# Altium PCB PCB1.PcbDoc
Units mm, origin at the board's own origin, x right, y up, seen from the top; angles counter-clockwise.
Board outline 27.69 x 26.04 mm, 2 copper layers (Top Layer, Bottom Layer); 14 components, 16 nets, 60 pads, 5 vias.
Unrouted connection lines stored in the file: 6.
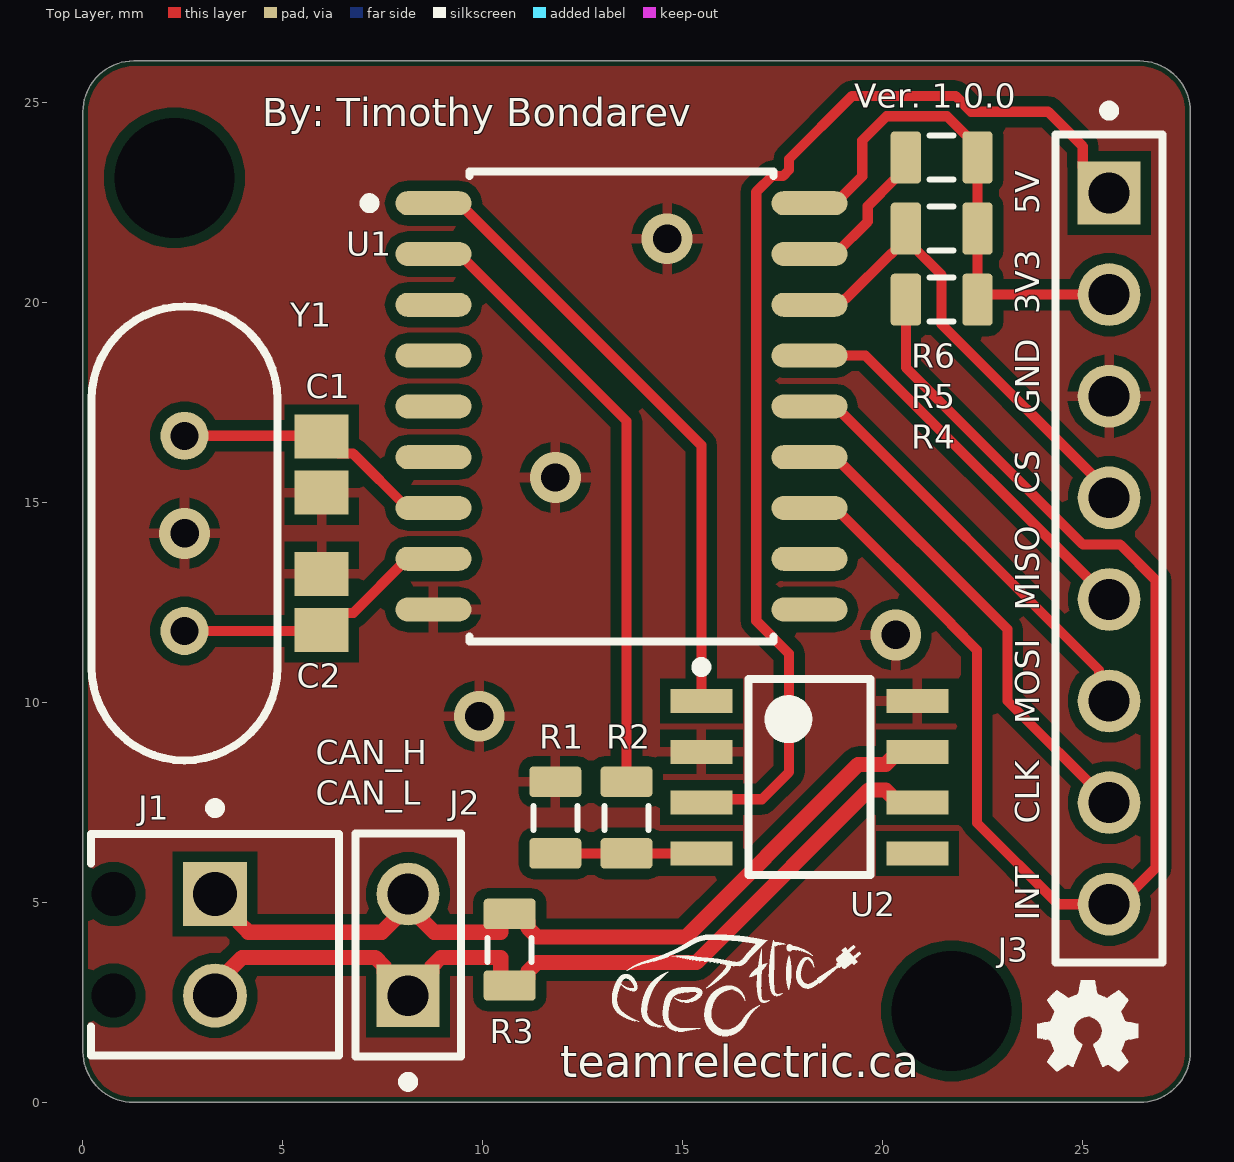
[diagram p0: Top Layer view]
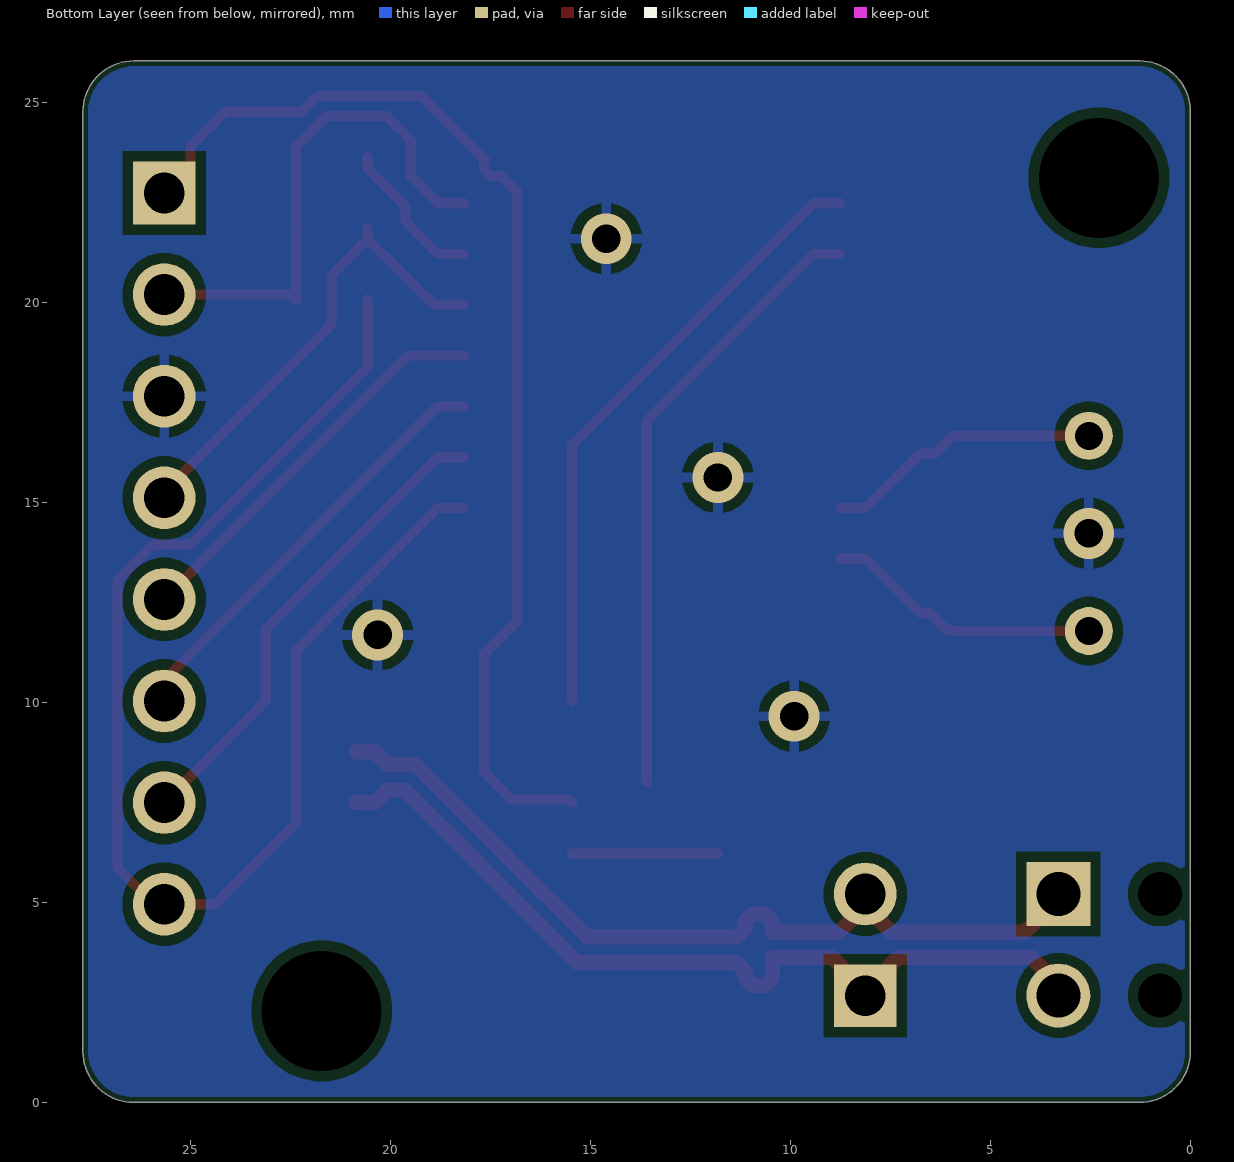
[diagram p1: Bottom Layer view, seen from below]
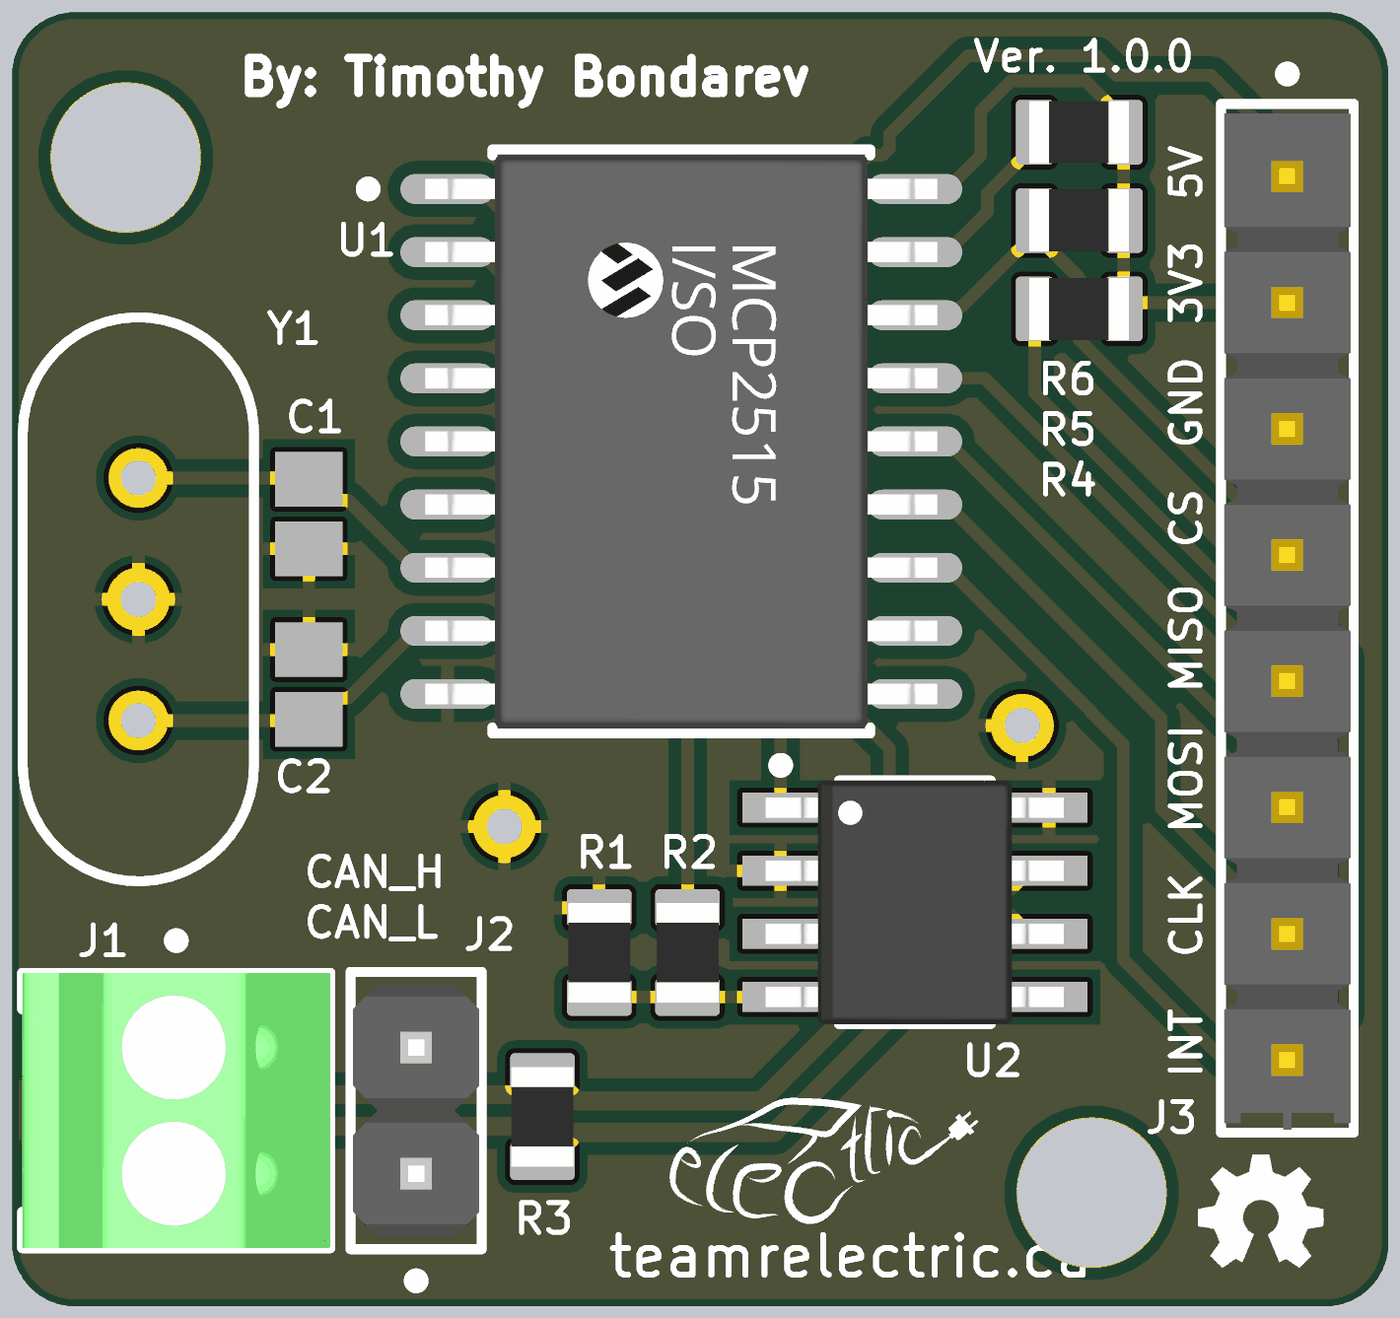
[diagram p2: 3D render of the assembled board from above, using the file's embedded part models]

## Layer stack, top to bottom
Top Solder: solder mask 0.0102, Solder Resist, Dk 3.5
Top Layer: signal copper 0.0356
Dielectric 1: dielectric 0.32, FR-4, Dk 4.8
Bottom Layer: signal copper 0.0356
Bottom Solder: solder mask 0.0102, Solder Resist, Dk 3.5

## Board outline
0,1.27 0,24.765 cw(c1.27,24.765) 1.27,26.035 26.416,26.035 cw(c26.416,24.765) 27.686,24.765 27.686,1.27 cw(c26.416,1.27) 26.416,0 1.27,0 cw(c1.27,1.27)

## Design rules (kind name [scope] priority, off if disabled: settings)
BoardOutlineClearance [All] p1: gap=0.127 ignorepadtopadclearanceinfootprint=FALSE except(0: Arc-SplitContinuation Track-SplitContinuation SMDPad-SplitContinuation THPad-SplitContinuation Via-SplitContinuation Fill-SplitContinuation Poly-SplitContinuation Region-SplitContinuation Text-SplitContinuation)
Clearance [All] p1: gap=0.254 ignorepadtopadclearanceinfootprint=FALSE except(0: Arc-Hole Track-Hole SMDPad-Hole THPad-Hole Via-Hole Fill-Hole Poly-Hole Region-Hole Text-Hole)
DiffPairsRouting [All] p1: maxlimit=0.254 minlimit=0.254 mostfreqgap=0.254 toplayer_minwidth=0.381 toplayer_maxwidth=0.381 toplayer_prefwidth=0.381 bottomlayer_minwidth=0.381 bottomlayer_maxwidth=0.381 bottomlayer_prefwidth=0.381 maxuncoupledlength=12.7
HoleSize [All] p1: absolutevalues=TRUE maxlimit=3 minlimit=0.025 maxpercent=80.000 minpercent=20.000
MinimumSolderMaskSliver [All] p1: minsoldermaskwidth=0.09
PolygonConnect [All] p1: connectstyle=Relief reliefconductorwidth=0.254 reliefentries=4 polygonreliefangle="90 Angle" airgapwidth=0.254
RoutingVias [All] p1: holewidth=0.711 width=1.27 viastyle="Through Hole" minholewidth=0.711 minwidth=1.27 maxholewidth=0.711 maxwidth=1.27
SilkToSilkClearance [All] p1: silktosilkclearance=0.2
SilkToSolderMaskClearance [IsPad] p1: minsilkscreentomaskgap=0.1 clearancetoexposedcopper=TRUE
SolderMaskExpansion [All] p1: expansion=0.102 istentingtop=FALSE
Width [All] p1: maxlimit=0.254 minlimit=0.254 preferedwidth=0.254
25 further rules are at their usual default settings.

## Classes and differential pairs
differential pair CAN: +CAN_P -CAN_N

## Components (designator, comment, footprint, x,y, rotation, side; value= is the part's Value field where it differs from the comment)
C1 "22pF" CAPC2013X140X50LL20T25 5.969,15.94 r90 top
C2 "22pF" CAPC2013X140X50LL20T25 5.969,12.511 r270 top
J1 "1725656" PHOE-1725656-2 3.302,3.937 r270 top
J2 "M20-9990246" FP-M20-9990246-MFG 8.128,3.937 r90 top
J3 "TSW-108-08-G-S" FP-TSW-108-08-G-S-MFG 25.654,13.843 r270 top
R1 "1KR5J" RESC0805(2012)_L 11.811,7.113 r270 top value=22kΩ
R2 "1KR5J" RESC0805(2012)_L 13.589,7.113 r270 top value=10kΩ
R3 "1KR5J" RESC0805(2012)_L 10.668,3.811 r270 top value=120Ω
R4 "1KR5J" RESC0805(2012)_L 21.463,20.066 r180 top value=4.7kΩ
R5 "1KR5J" RESC0805(2012)_L 21.464,21.844 r180 top value=4.7kΩ
R6 "1KR5J" RESC0805(2012)_L 21.463,23.622 r180 top value=4.7kΩ
U1 "MCP2515-I/SO" FP-C04-051-MFG 13.462,17.399 r0 top
U2 "MCP2551-I/SN" MCHP-SN8_V 18.161,8.128 r0 top
Y1 "160MHz" FOX-FOXSLF-2_V 2.54,14.224 r270 top

## Footprints (in the part's own frame and the unit in brackets; to place one, negate y for a bottom-side part, rotate by r counter-clockwise, add the part's x,y. Pads: shape width x height; smd on the part's side, far side on the other; paste and mask are expansions set on the pad)
CAPC2013X140X50LL20T25 [mm] "Chip Capacitor, 2-Leads, Body 2.00x1.25mm, IPC High Density"
  rect 1.1x1.35 smd: 1(-0.7,0) 2(0.7,0)
  body extent -1.1,-0.72 1.1,0.72, height 1.4
FOX-FOXSLF-2_V [mm] "THD, 2-Leads, Body 11.35x4.65mm, Pitch 4.88mm"
  round 1.2 hole 0.7: 1(-2.44,0) 2(2.44,0)
  silkscreen extent -5.68,-2.32 5.68,2.32, body extent -5.67,-2.32 5.68,2.32, height 3.6
FP-C04-051-MFG [mm]
  rrect100% 1.9x0.6 smd paste+0 mask+0: 1(-4.7,5.08) 2(-4.7,3.81) 3(-4.7,2.54) 4(-4.7,1.27) 5(-4.7,0) 6(-4.7,-1.27) 7(-4.7,-2.54) 8(-4.7,-3.81) 9(-4.7,-5.08) 10(4.7,-5.08) 11(4.7,-3.81) 12(4.7,-2.54) 13(4.7,-1.27) 14(4.7,0) 15(4.7,1.27) 16(4.7,2.54) 17(4.7,3.81) 18(4.7,5.08)
  silkscreen extent -6.42,-5.87 3.8,5.87, body extent -5.75,-6.12 5.75,6.12, height 0.25
FP-M20-9990246-MFG [mm]
  rect 1.57x1.57 hole 1.02 paste-1000 mask+0: 1(-1.27,0)
  round 1.57 hole 1.02 paste-1000 mask+0: 2(1.27,0)
  silkscreen extent -3.55,-1.32 2.79,1.32, body extent -2.89,-1.42 2.89,1.42, height 0.25
FP-TSW-108-08-G-S-MFG [mm]
  rect 1.57x1.57 hole 1.02 paste-1000 mask+0: 1(-8.89,0)
  round 1.57 hole 1.02 paste-1000 mask+0: 2(-6.35,0) 3(-3.81,0) 4(-1.27,0) 5(1.27,0) 6(3.81,0) 7(6.35,0) 8(8.89,0)
  silkscreen extent -11.07,-1.34 10.35,1.34, body extent -10.16,-1.27 10.29,1.27, height 8.71
MCHP-SN8_V [mm] "SOIC, 8-Leads, Body 4.9x3.9mm, Pitch 1.27mm"
  rect 1.55x0.6 smd: 1(-2.7,1.905) 2(-2.7,0.635) 3(-2.7,-0.635) 4(-2.7,-1.905) 5(2.7,-1.905) 6(2.7,-0.635) 7(2.7,0.635) 8(2.7,1.905)
  silkscreen extent -2.82,-2.45 1.53,2.88, body extent -3,-2.45 3,2.45, height 1.75
PHOE-1725656-2 [mm] "Connector, 2-Leads, Body 6.2x5.4mm, Pitch 2.54mm"
  rect 1.6x1.6 hole 1.1: 1(-1.27,0)
  round 1.6 hole 1.1: 2(1.27,0)
  round 0 hole 1.1 unplated: MH1(-1.27,-2.54) MH2(1.27,-2.54)
  silkscreen extent -3.54,-3.1 2.77,3.1, body extent -2.77,-3.1 2.77,3.1, height 9
RESC0805(2012)_L [mm] "Chip Resistor, Body 2.0x1.3mm, IPC High Density"
  rrect25% 0.76x1.3 smd: 1(-0.9,0) 2(0.89,0)
  silkscreen extent -0.3,-0.55 0.3,0.55, body extent -1,-0.62 1,0.63, height 0.6

## Part data
C1 C2: library part CMP-2000-05810-1, "Chip Capacitor, 2.2 uF, +/- 10%, 10 V, -55 to 85 degC, 0805 (2012 Metric), RoHS, Tape and Reel", Capacitance=2.2µF, Case Size/Dimension=0805, Dielectric=X5R, Manufacturer=AVX, Package Description="2-Pin Surface Mount Device, Body 2.01 x 1.25 mm", Rated Voltage=10V, Tolerance (%)=±10%, Datasheet URL=http://datasheets.avx.com/cx5r.pdf, Datasheet Version=05/2016, Manufacturer URL=http://www.avx.com/, Mounting Technology=SurfaceMount, Package Reference=0805
J1: library part CMP-2000-05299-1, "Male Header, Pitch 2.54 mm, 1 x 2 Position, Height 9 mm, Tail Length 3.5 mm", Colour=Green, Manufacturer="Phoenix Contact", Content=250pc(s), Datasheet URL=http://datasheet.octopart.com/1725656-Phoenix-Contact-datasheet-5302866.pdf, Datasheet Version=Apr-08, Industrial packaging=Yes, Manufacturer part No.=1725656, Manufacturer URL=http://www.phoenixcontact.com/, Number Of Contacts=2, Pitch=2.54mm, Type=MPT0,5/2-2,54
J2: library part CMP-15831-000009-1, "CONN HEADER VERT 2POS 2.54MM", Current Rating=3A, Manufacturer=Harwin, Temperature="-40°C to +105°C", Temperature Range High=+105°C, Temperature Range Low=-40°C, Automotive=No, Category=Conn, ComponentLink2Description=Datasheet, ComponentLink2URL=https://cdn.harwin.com/pdfs/M20-999.pdf, Conn Gender=Male, Conn Orientation=Vertical, Contact Material=Tin,Nickel, Device Class L1=Connectors, Device Class L2="Headers and Wire Housings", Device Class L3=unset, Digikey Description="CONN HEADER VERT 2POS 2.54MM", Height=8.99mm, Lead Free=Yes, Manufacturer Part Number=M20-9990246, Mouser Description="2.54mm (0.1\") Pitch SIL Vertical PC Tail Pin Header, 6.1mm mating pin height, tin, 2 contacts", Number Of Contacts=2, Number Of Rows=1, Octopart=https://octopart.com/m20-9990246-harwin-2590635, Package=M20-9990246, Pitch=2.54mm, RoHS=TRUE
J3: library part CMP-02766-000001-1, "CONN HEADER VERT 8POS 2.54MM", Manufacturer=Samtec, Temperature="-55°C to +125°C", Temperature Range High=+125°C, Temperature Range Low=-55°C, Automotive=No, Category=Conn, ComponentLink2Description=Datasheet, ComponentLink2URL=http://suddendocs.samtec.com/catalog_english/tsw_th.pdf, Conn Gender=Male, Conn Orientation=Straight, Contact Material=Gold,Nickel, Device Class L1=Connectors, Device Class L2="Headers and Wire Housings", Device Class L3=unset, Digikey Description="CONN HEADER VERT 8POS 2.54MM", Footprint Url=http://suddendocs.samtec.com/prints/tsw-xxx-xx-x-x-xx-xxx-footprint.pdf, Height=8.71mm, Lead Free=Yes, Manufacturer Part Number=TSW-108-08-G-S, Mouser Description="TSW - Samtec 2.54mm Pin Header 13.46mm Overall Pin Length 5.08mm Tail", Number Of Contacts=8, Number Of Rows=1, Octopart=https://octopart.com/tsw-108-08-g-s-samtec-272653, Package=TSW-108-08-G-S, Pitch=2.54mm, RoHS=TRUE
R1 R2 R3 R4 R5 R6: library part CMP-009-00076-1, "1K 0.125W 5% 0805 (2012 Metric)  SMD", Case/Package=0805, Power=0.125W, Tolerance=5%, Mounting Technology=SMT, Pins=2
U1: library part CMP-0186-00133-3, "IC CAN CONTROLLER W/SPI 18SOIC", Ambient Temperature Range High=+125°C, Ambient Temperature Range Low=-65°C, Manufacturer=Microchip, Max Supply Voltage=5.5V, Min Supply Voltage=2.7V, Nominal Supply Current=10mA, Package=C04-051, Temperature="-40°C to +85°C", Temperature Range High=+85°C, Temperature Range Low=-40°C, Automotive=No, Category=IC, ComponentLink2Description=Datasheet, ComponentLink2URL=http://ww1.microchip.com/downloads/en/DeviceDoc/MCP2515-Stand-Alone-CAN-Controller-with-SPI-20001801J.pdf, Device Class L1="Integrated Circuits (ICs)", Device Class L2="Interface ICs", Device Class L3=Controllers, Digikey Description="IC CAN CONTROLLER W/SPI 18SOIC", Footprint Url=http://ww1.microchip.com/downloads/en/DeviceDoc/18L_SOIC_Wide_7.50_SO_C04-0051D.pdf, Function=Controller, Height=2.65mm, Interface=SPI,CAN, Ipc Land Pattern Name=SOIC127P1030X265-18, Lead Free=Yes, Manufacturer Part Number=MCP2515-I/SO, Mouser Description="CAN Interface IC W/ SPI Interface", Octopart=https://octopart.com/mcp2515-i%2Fso-microchip-430187, RoHS=TRUE, Standoff Height=0.1mm
U2: library part CMP-0186-00138-3, "High-Speed CAN Transceiver, /  1 Mb/s, 4.5 to 5.5 V, 8-Pin SOIC (SN), Industrial Temperature, RoHS, Tube", Manufacturer=Microchip, ComponentLink1Description="Manufacturer URL", ComponentLink1URL=http://www.microchip.com/, ComponentLink2Description=Datasheet, ComponentLink2URL=http://ww1.microchip.com/downloads/en/DeviceDoc/21667f.pdf, ComponentLink3Description="Package Specification", ComponentLink3URL=http://www.microchip.com/stellent/groups/techpub_sg/documents/packagingspec/en012702.pdf, DatasheetVersion="Rev. F, 07/2010", Mounting Technology="Surface Mount", PackageDescription="8-Pin Small Outline Integrated Circuit, Body 4.9 x 3.9 mm, Pitch 1.27 mm", PackageReference=SN8, RoHSCompliant=true
Y1: library part CMP-1749-00004-1, "Resistance Weld Thru-Hole Crystal, 12 MHz, +/-30 ppm, -20 to 70 degC, 2-Pin THD, RoHS, Bulk", Case\Package=TO-251-3, Input Capacitance="350 pF", Max Operating Temperature="150 degC", Max Power Dissipation="2.5 W", Min Operating Temperature="-55 degC", Package Quantity=70, ComponentLink1Description="Manufacturer URL", ComponentLink1URL=http://www.foxonline.com/, ComponentLink2Description=Datasheet, ComponentLink2URL=http://www.foxonline.com/pdfs/hc49slf.pdf, DatasheetVersion=Mar-15, Elements=1, Height="6.1 mm", Length="6.6 mm", Mount="Through Hole", PackageDescription="2-Pin Through Hole Device, Body 11.35 x 4.65 mm, Pitch 4.88 mm", PackageReference=FOXSLF-2, Packaging=Rail/Tube, Pins=3, Radiation Hardening=No, Rds On Max="115 mohm", REACH SVHC="No SVHC", RoHSCompliant=true, Typical Rise Time="90 ns", Width="2.3 mm"

## Free pads (board coordinates)
  round 1.524 hole 3: 1(21.717,2.286) 2(2.286,23.114)

## Via types
v1: diameter 1.27, hole 0.711, Top Layer to Bottom Layer, 5 vias

## Nets (pads, with @x,y where several pads share a name; then routed paths per layer and width w, separated by ;. In a path a pad name is that pad's centre, name@x,y a point inside that pad or via, vN(x,y) a via of type N, cw(c..) or ccw(c..) an arc to the next point about the centre after c; other vN are vias at no path point)
3V3: J3.2 R4.1 R5.1 R6.1 U1.18 | length 13.1
  Top Layer w0.254: U1.18 18.812,22.479 19.485,23.152 19.485,24.047 20.091,24.653 21.602,24.653 22.363,23.892 R6.1 R5.1 22.364,20.067 22.49,20.193 J3.2
5V: J3.1 U2.3 | length 28.6
  Top Layer w0.254: U2.3 15.546,7.578 16.976,7.578 17.653,8.255 17.653,11.215 16.831,12.037 16.831,22.761 17.23,23.16 17.504,23.16 17.653,23.309 17.653,23.583 19.231,25.161 21.812,25.161 22.208,24.765 24.13,24.765 24.996,23.899 24.996,23.391 J3.1
CAN_N: J1.2 J2.1 R3.2 U2.6 | length 21.9
  Top Layer w0.381: J1.2 3.302,2.948 3.973,3.619 7.31,3.619 7.534,3.396 7.534,3.261 J2.1 8.722,3.261 8.722,3.396 8.946,3.619 10.445,3.619 10.445,3.111 10.634,2.921 R3.2 10.938,2.921 11.128,3.111 11.128,3.275 11.351,3.499 15.338,3.499 17.714,5.875 17.714,5.883 19.641,7.81 20.068,7.81 20.386,7.493 U2.6
CAN_P: J1.1 J2.2 R3.1 U2.7 | length 21.5
  Top Layer w0.381: J1.1 3.912,4.597 3.912,4.478 4.135,4.255 7.478,4.255 J2.2@8.128,4.905 ; J2.2 J2.2@8.128,4.905 ; U2.7 20.386,8.763 20.068,8.445 19.378,8.445 17.079,6.146 17.079,6.138 15.075,4.134 11.351,4.134 11.128,4.357 11.128,4.521 10.938,4.711 R3.1 10.634,4.711 10.445,4.521 10.445,4.255 8.778,4.255 J2.2@8.128,4.905
GND: C1.1 C2.1 J3.3 R1.1 U1.9 U2.2 U2.8
  other v1: 9.906,9.652 20.32,11.684 2.54,14.224 11.811,15.621 14.605,21.59
NetC1_2: C1.2 U1.7 Y1.1 | length 7
  Top Layer w0.254: Y1.1 5.945,16.664 C1.2 6.392,16.217 6.756,16.217 8.114,14.859 U1.7
NetC2_2: C2.2 U1.8 Y1.2 | length 7
  Top Layer w0.254: Y1.2 5.942,11.784 C2.2 6.096,11.811 6.096,11.813 6.517,12.234 6.757,12.234 8.112,13.589 U1.8
NetR1_2: R1.2 R2.2 U2.4 | length 3.7
  Top Layer w0.254: R1.2 R2.2 U2.4
NetR2_1: R2.1 U1.2 | length 15.6
  Top Layer w0.254: U1.2 9.412,21.209 13.589,17.032 R2.1
NetR6_2: R6.2 U1.17 | length 3.8
  Top Layer w0.254: U1.17 18.812,21.209 19.62,22.017 19.62,22.404 20.316,23.099 20.32,23.099 20.573,23.352 R6.2
NetU1_1: U1.1 U2.1 | length 15.6
  Top Layer w0.254: U1.1 9.412,22.479 15.461,16.43 U2.1
RBPi_CLK_Pin_13: J3.7 U1.13 | length 12.1
  Top Layer w0.254: U1.13 18.812,16.129 23.114,11.827 23.114,10.033 J3.7
RBPi_CS_Pin_24: J3.4 R5.2 U1.16 | length 11.9
  Top Layer w0.254: U1.16 18.906,19.939 19.078,20.111 19.095,20.111 20.193,21.209 20.209,21.209 R5.2@20.574,21.574 ; R5.2 R5.2@20.574,21.574 ; J3.4 25.654,15.262 21.468,19.448 21.468,20.684 21.055,21.097 21.051,21.097 R5.2@20.574,21.574
RBPi_INT_Pin_22: J3.8 R4.2 U1.12 | length 33
  Top Layer w0.254: U1.12 18.812,14.859 21.717,11.954 21.717,11.938 22.352,11.303 22.352,6.985 24.384,4.953 25.908,4.953 26.82,5.865 26.82,13.056 25.929,13.947 24.998,13.947 20.573,18.372 R4.2
RBPi_MISO_Pin_21: J3.5 U1.15 | length 10
  Top Layer w0.254: U1.15 19.558,18.669 J3.5
RBPi_MOSI_Pin_19: J3.6 U1.14 | length 10.9
  Top Layer w0.254: U1.14 18.812,17.399 25.402,10.809 25.402,10.285 J3.6
pads on no net: J1.MH1 J1.MH2 U1.3 U1.4 U1.5 U1.6 U1.10 U1.11 U2.5

## Polygon pours and split planes (outlines as drawn)
GND on Bottom Layer "GND_L02_P000" (solid, pour order 0): -1.905,27.432 -1.778,27.305 28.829,27.305 28.956,27.178 28.956,-1.016 28.702,-1.016 28.321,-0.635 -2.794,-0.635 -2.794,10.16 -2.921,10.287 -2.921,12.827 -3.048,12.954 -3.048,15.494 -1.905,16.637 -1.905,16.891 -1.397,17.399 -1.397,18.923 -2.159,19.685 -2.667,19.685 -3.81,20.828 -3.81,21.844 -2.921,22.733 -2.286,22.733 -2.032,22.987 -1.27,22.987 -0.635,23.622 -0.635,24.765 -1.397,25.527 -2.667,25.527 -3.048,25.908 -3.175,25.908 -3.175,26.289 -2.921,26.543
GND on Top Layer "GND_L01_P001" (solid, pour order 1): -0.889,27.051 -0.889,-1.016 -0.635,-1.016 -0.508,-0.889 28.448,-0.889 28.575,-0.762 28.575,27.686

## Silkscreen, mask and mechanical layers (free items; w line width, h text height)
Top Overlay:
  drawing of 11 lines, arcs and shapes, not listed
  text "Ver. 1.0.0" at 19.277,24.865 h0.6
  text "By: Timothy Bondarev" at 4.488,24.406 h0.7
  text "5V" at 23.903,22.198 h0.6 r90
  text "3V3" at 23.903,19.7 h0.6 r90
  text "GND" at 23.903,17.202 h0.6 r90
  text "CS" at 23.903,15.204 h0.6 r90
  text "MISO" at 23.903,12.289 h0.6 r90
  text "MOSI" at 23.903,9.458 h0.6 r90
  text "CAN_H" at 5.815,8.455 h0.6
  text "CAN_L" at 5.815,7.439 h0.6
  text "CLK" at 23.903,6.96 h0.6 r90
  text "INT" at 23.903,4.545 h0.6 r90
  text "teamrelectric.ca" at 11.931,0.628 h0.8